# Altium PCB Beetech Metro Shield 1.0.PcbDoc
Units mm, origin at the board's own origin, x right, y up, seen from the top; angles counter-clockwise.
Board outline 68 x 53.53 mm, 2 copper layers (Top Layer, Bottom Layer), stack 1.671 mm thick; 23 components, 21 nets, 102 pads, 73 vias.
Unrouted connection lines stored in the file: 80.
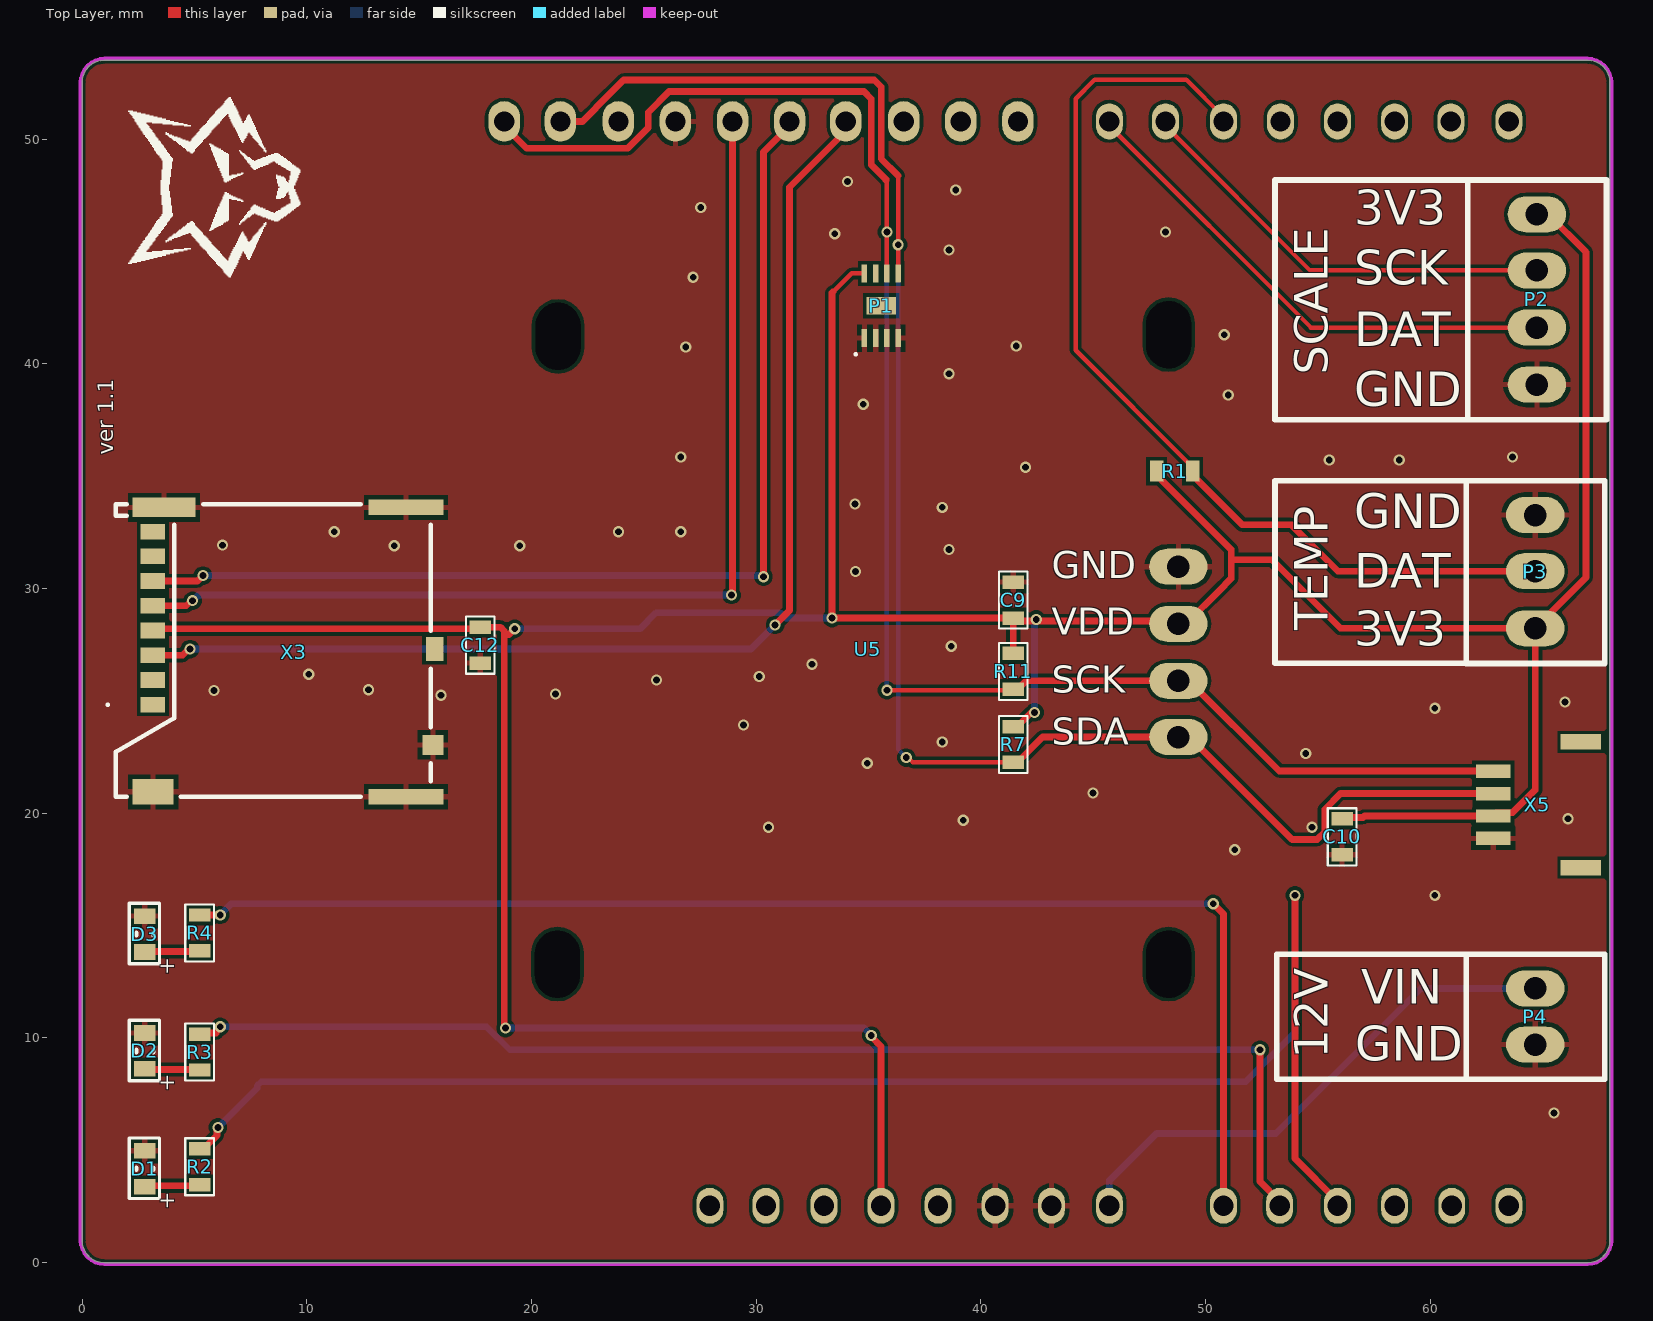
[diagram p0: Top Layer view]
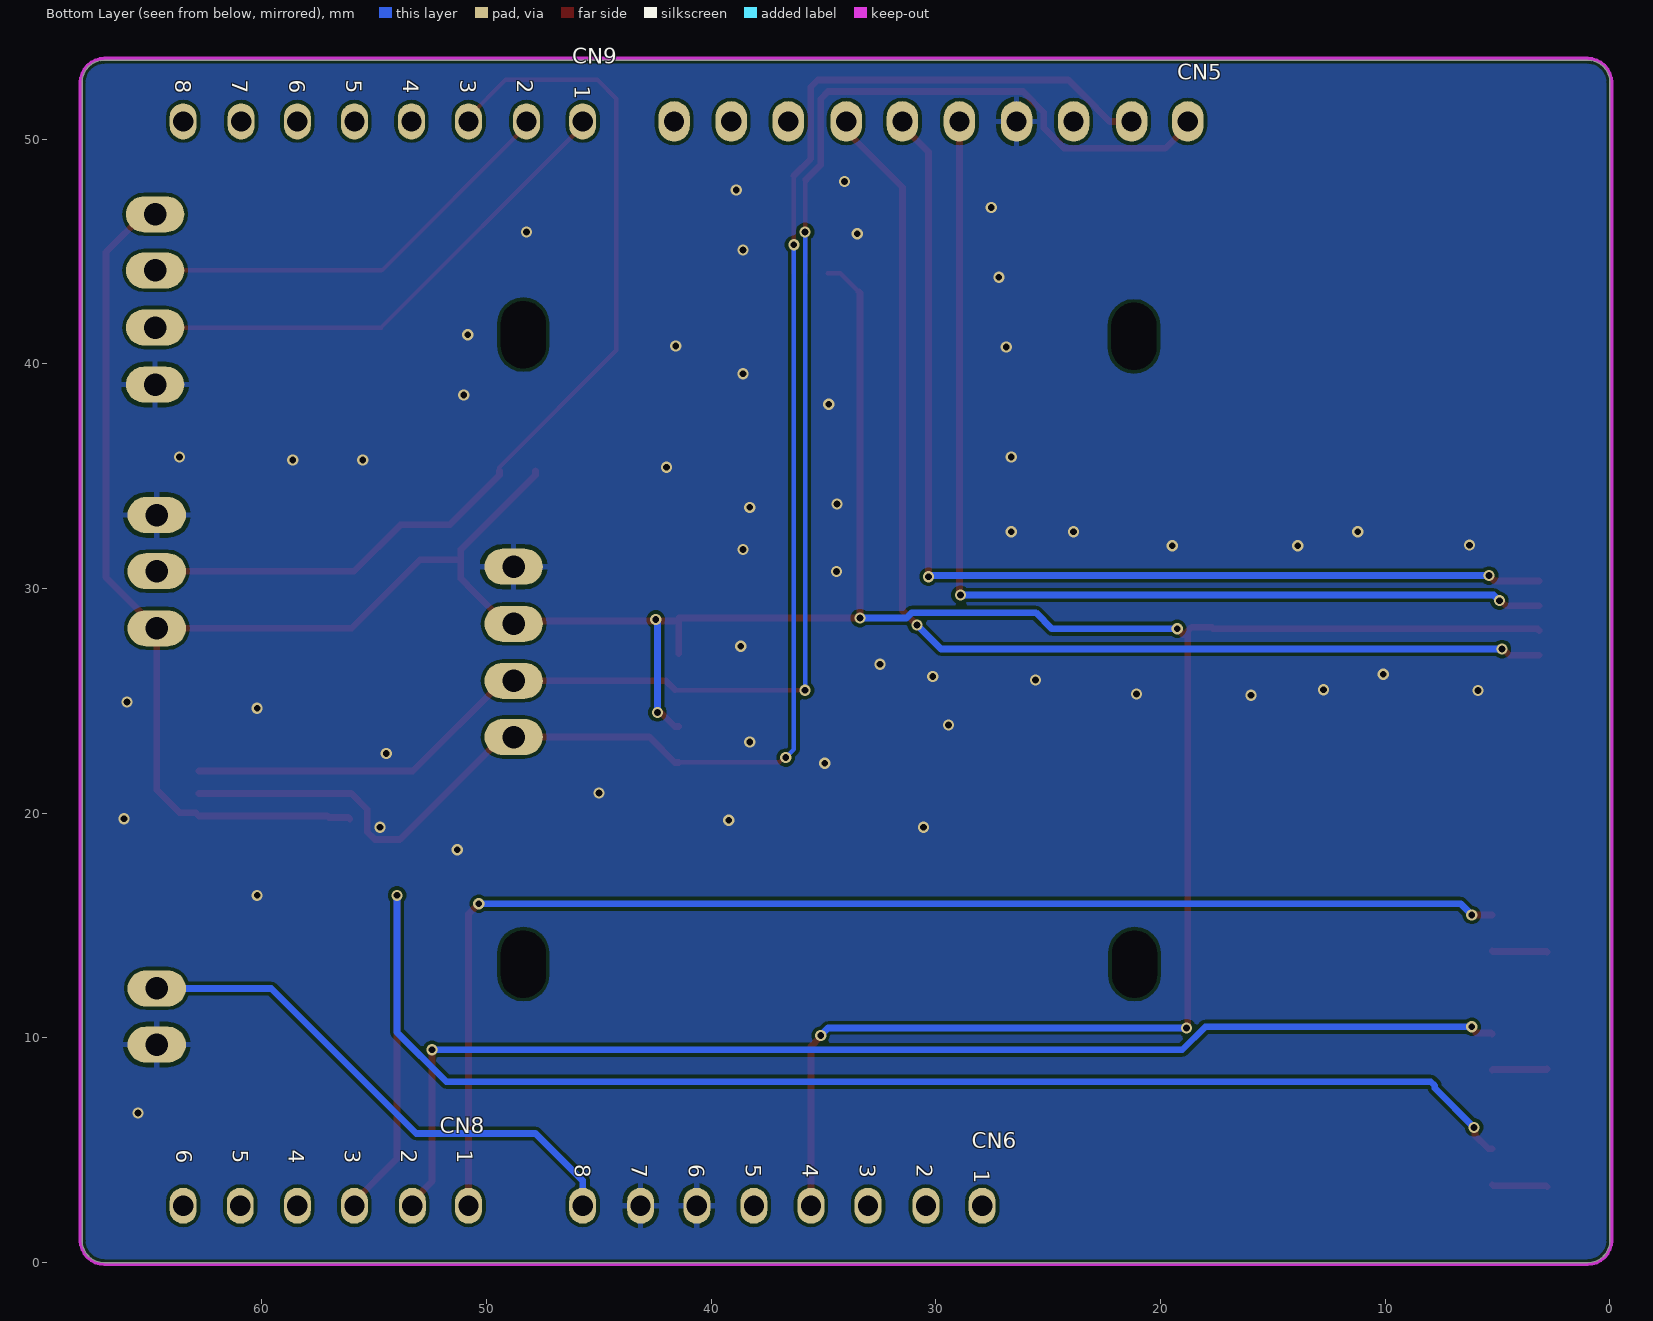
[diagram p1: Bottom Layer view, seen from below]
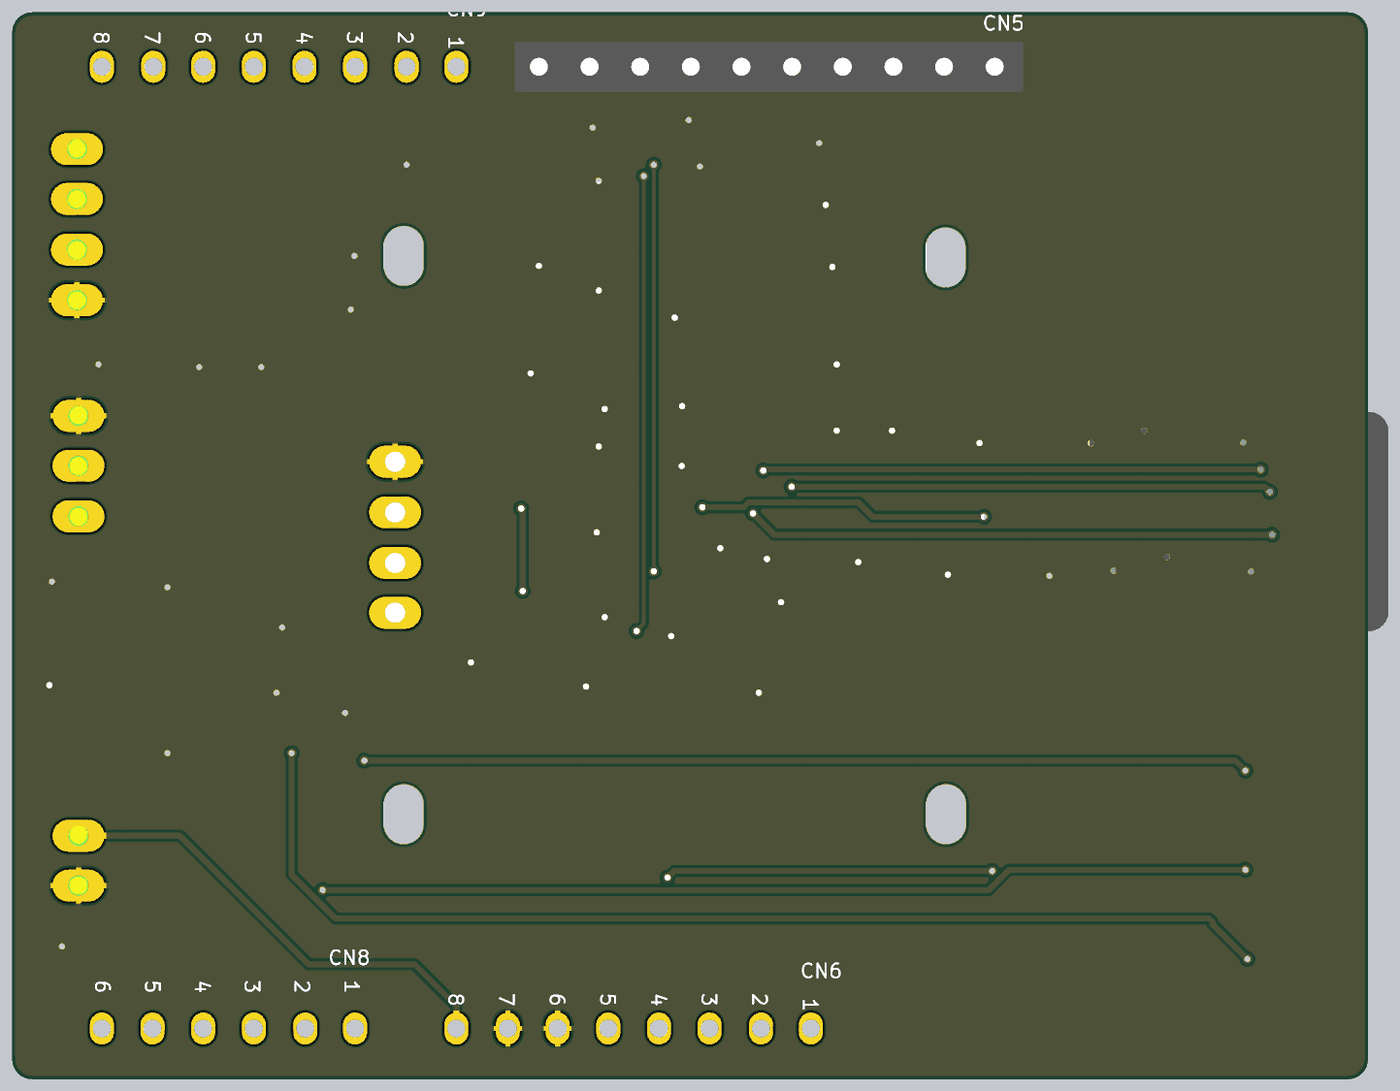
[diagram p2: 3D render of the assembled board from below, using the file's embedded part models]

## Layer stack, top to bottom
Top Solder: solder mask 0.0102, Solder Resist, Dk 3.5
Top Layer: signal copper 0.0356
Dielectric1: core 1.6, FR-4, Dk 4.8
Bottom Layer: signal copper 0.0356
Bottom Solder: solder mask 0.0102, Solder Resist, Dk 3.5

## Board outline
67,53.522 1,53.522 0.805,53.503 0.617,53.446 0.444,53.354 0.293,53.229 0.169,53.078 0.076,52.905 0.019,52.717 0,52.522 0,0.992 0.019,0.797 0.076,0.61 0.169,0.437 0.293,0.285 0.444,0.161 0.617,0.068 0.805,0.012 1,-0.008 67,-0.008 67.195,0.012 67.383,0.068 67.556,0.161 67.707,0.285 67.831,0.437 67.924,0.61 67.981,0.797 68,0.992 68,52.522 67.981,52.717 67.924,52.905 67.831,53.078 67.707,53.229 67.556,53.354 67.383,53.446 67.195,53.503

## Design rules (kind name [scope] priority, off if disabled: settings)
Clearance [All] p1: gap=0.15 ignorepadtopadclearanceinfootprint=FALSE
ComponentClearance [All] p1: gap=0.001 collisioncheckmode=3 verticalgap=0.254 showdistances=FALSE
FabricationTestPointUsage [All] p1 off: valid=0 allowmultiple=FALSE
FabricationTestpoint [All] p1 off: side=3 testpointundercomponent=TRUE minsize=1.016 maxsize=2.54 preferedsize=1.524 minholesize=0 maxholesize=1.016 preferedholesize=0.813 testpointgrid=0.025 allowsidetop=TRUE allowsidebottom=TRUE usegrid=TRUE gridtolerance=0
HoleSize [All] p1: absolutevalues=TRUE maxlimit=3.81 minlimit=0.025 maxpercent=80.000 minpercent=20.000
HoleToHoleClearance [All] p1: gap=0 allowstackedmicrovias=TRUE
MinimumSolderMaskSliver [All] p1: minsoldermaskwidth=0
PolygonConnect [InNet('VCC 3.3V')] p1: connectstyle=Direct reliefconductorwidth=0.254 reliefentries=4 polygonreliefangle="90 Angle" airgapwidth=0.254
PolygonConnect PolygonConnect_1 [InNet('GND')] p2: thpad.connectstyle=Relief thpad.reliefconductorwidth=0.254 thpad.reliefentries=4 thpad.polygonreliefangle="90 Angle" thpad.airgapwidth=0.2 smdpad.connectstyle=Relief smdpad.reliefconductorwidth=0.254 smdpad.reliefentries=4 smdpad.polygonreliefangle="90 Angle" smdpad.airgapwidth=0.2 via.connectstyle=Direct via.reliefconductorwidth=0.254 via.reliefentries=4 via.polygonreliefangle="90 Angle" via.airgapwidth=0.2
RoutingVias [All] p1: holewidth=0.3 width=0.5 viastyle="Through Hole" minholewidth=0.2 minwidth=0.4 maxholewidth=1.2 maxwidth=2 useviatemplates=TRUE viatemplateguid#1={3DB4D02C-F2AA-4D96-93EA-058B72C6274F} viatemplateguid#2={7253A52D-AA54-4A84-B513-F050F2263B0A} viatemplatename#1=v50h30m0mx0 viatemplatename#2=v50h30m50mx0
SilkToSilkClearance [All] p1: silktosilkclearance=0.152
SilkToSolderMaskClearance [IsPad] p1: minsilkscreentomaskgap=0 clearancetoexposedcopper=TRUE
SolderMaskExpansion [All] p1: expansion=0.102 istentingtop=FALSE
SupplyNets "Schematic Supply Nets_7" [InNet('VIN')] p1: voltage=0.000
SupplyNets "Schematic Supply Nets_6" [InNet('5V')] p2: voltage=0.000
SupplyNets "Schematic Supply Nets_5" [InNet('3V3')] p3: voltage=0.000
SupplyNets "Schematic Supply Nets" [InNet('GND')] p4: voltage=0.000
Width [All] p1: maxlimit=5.08 minlimit=0.01 preferedwidth=0.305 minimp=50.000000 maximp=50.000000 favimp=50.000000
22 further rules are at their usual default settings.

## Components (designator, comment, footprint, x,y, rotation, side; value= is the part's Value field where it differs from the comment)
C9 "10uF 0603" "CAP 0603 - OUTLINE" 41.447,29.489 r270 top value=10uF
C10 "10uF 0603" "CAP 0603 - OUTLINE" 56.081,18.95 r90 top value=10uF
C12 "10uF 0603" "CAP 0603 - OUTLINE" 17.724,27.483 r90 top value=10uF
CN5 "10-Pin Stiftleiste 10x1 2.54 Low Profile" "10PIN - III" 18.79,50.792 r270 bottom locked
CN6 "8-Pin Stiftleiste 8x1 2.54 Low Profile" "8 PIN - Stiftleiste" 27.94,2.532 r270 bottom locked
CN8 "6-PiN" 6PIN 50.8,2.532 r270 bottom locked
CN9 "8-Pin Stiftleiste 8x1 2.54 Low Profile" "8 PIN - Stiftleiste" 45.72,50.792 r270 bottom locked
D1 "LED Diode SMD LOW CURRENT" "LED SMD 0603 FOOTPRINT" 2.788,4.176 r90 top
D2 "LED Diode SMD LOW CURRENT" "LED SMD 0603 FOOTPRINT" 2.788,9.423 r90 top
D3 "LED Diode SMD LOW CURRENT" "LED SMD 0603 FOOTPRINT" 2.788,14.623 r90 top
P1 "EEPROM CAT24C512HU5IGT3" "UDFN8 3.0x2.0 CAT24C512HU5IGT3" 35.57,42.588 r90 top
P2 "4-Pin Right Angle Housing" "4PIN - RND 205-EK254-2.54-04P" 64.75,46.659 r0 top
P3 "3-Pin Right Angle Housing" "3PIN - RND 205-EK254-2.54-03P" 64.674,33.273 r0 top
P4 "2-Pin Right Angle Housing" "2PIN - RND 205-EK254-2.54-02P" 64.674,12.204 r0 top
R1 "4.7k Ohm 0603" "RES 0603 FOOTPRINT" 48.622,35.23 r180 top value=4.7k
R2 "330 Ohm 0603" "RES 0603 FOOTPRINT - OUTLINE" 5.232,4.267 r90 top value=330
R3 "750 Ohm 0603" "RES 0603 FOOTPRINT - OUTLINE" 5.232,9.373 r90 top value=750
R4 "330 Ohm 0603" "RES 0603 FOOTPRINT - OUTLINE" 5.232,14.673 r90 top value=330
R7 "10k Ohm 0603" "RES 0603 FOOTPRINT - OUTLINE" 41.447,23.061 r90 top value=10k
R11 "10k Ohm 0603" "RES 0603 FOOTPRINT - OUTLINE" 41.447,26.312 r90 top value=10k
U5 "OLED I2C 1.3 128x64" "OLED 1.3 128x64 I2C" 48.793,23.393 r180 top locked
X3 "SD micro Card Holder_4" "SD Card Holder - micro - 4" 8.788,27.214 r90 top
X5 "4-Pin" "QWIIC JST CONNECTOR - SMD 4-PIN" 62.806,20.378 r90 top

## Footprints (in the part's own frame and the unit in brackets; to place one, negate y for a bottom-side part, rotate by r counter-clockwise, add the part's x,y. Pads: shape width x height; smd on the part's side, far side on the other; paste and mask are expansions set on the pad)
"2PIN - RND 205-EK254-2.54-02P" [mm] "RND 205-EK254-2.54-02P"
  oval 2.6x1.6 hole 1: 1(0,0) 2(0,-2.5)
  silkscreen extent -3.07,-4.04 3.1,1.52, body extent -3.1,-3.99 3.1,1.55, height 8.51
"3PIN - RND 205-EK254-2.54-03P" [mm] "RND 205-EK254-2.54-03P"
  oval 2.6x1.6 hole 1: 1(0,0) 2(0,-2.5) 3(0,-5.04)
  silkscreen extent -3.07,-6.6 3.1,1.52, body extent -3.1,-6.55 3.1,1.53, height 8.51
"4PIN - RND 205-EK254-2.54-04P" [mm] "RND 205-EK254-2.54-04P"
  oval 2.6x1.6 hole 1: 1(0,0) 2(0,-2.5) 3(0,-5.04) 4(0,-7.58)
  silkscreen extent -3.07,-9.14 3.1,1.52, body extent -3.1,-9.1 3.1,1.52, height 8.51
6PIN [mm]
  oval 1.6x1.2 hole 0.9: 1(0,0) 2(0,-2.5) 3(0,-5.08) 4(0,-7.62) 5(0,-10.16) 6(0,-12.7)
"8 PIN - Stiftleiste" [mm] "2212S-08SG-85 -  Board-to-Board-Steckve61300811021 -  Board-to-Board-Steckverbinder, abgewinkelt, 2.54 mm, 8 Kontakt(e), Stiftleiste, Baureihe WR-PHD rbinder, 2.54 mm, 8 Kontakt(e), Buchse, Baureihe 2212S, Durchsteckmontage"
  oval 1.6x1.2 hole 0.9: 1(0,0) 2(0,-2.5) 3(0,-5.08) 4(0,-7.62) 5(0,-10.16) 6(0,-12.7) 7(0,-15.2) 8(0,-17.78)
  body extent -1.25,-18.99 1.25,1.51, height 8
"10PIN - III" [mm]
  oval 1.8x1.4 hole 0.9: 1(0,0) 2(0,-2.5) 3(0,-5.08) 4(0,-7.62) 5(0,-10.16) 6(0,-12.7) 7(0,-15.2) 8(0,-17.78) 9(0,-20.32) 10(0,-22.86)
  body extent -1.25,-24 1.25,1.5, height 8
"CAP 0603 - OUTLINE" [mm] "CAP 0603"
  rect 0.6x0.95 smd: 1(-0.8,0) 2(0.8,0)
  silkscreen extent -1.27,-0.64 1.27,0.64, body extent -0.8,-0.4 0.8,0.4, height 0.8
"LED SMD 0603 FOOTPRINT" [mm] "Chip Diode, 2-Leads, Body 1.60x0.80mm, IPC Medium Density"
  rect 0.7x0.95 smd: 1(-0.8,0) 2(0.8,0)
  silkscreen extent -1.32,-0.66 1.37,0.69, body extent -0.8,-0.4 0.8,0.4, height 0.35
"OLED 1.3 128x64 I2C" [mm] "OLED 1.3 128x64 I2C"
  oval 2.6x1.6 hole 1: 1(0,-7.58) 2(0,-5.04) 3(0,-2.5) 4(0,0)
  rrect50% 1x1 hole 2 slot 3 at 90 deg: 5(0.432,10.109) 6(27.635,10.109) 7(27.61,-17.831) 8(0.432,-17.907)
  body extent -1.45,-21.64 29.55,13.86, height 8.6
"QWIIC JST CONNECTOR - SMD 4-PIN" [mm] "QWIIC JST CONNECTOR - SMD 4-PIN"
  rect 0.7x1.8 smd: 0(-2.8,-3.9) 0(2.8,-3.9)
  rect 0.6x1.55 smd: 1(1.5,0) 2(0.5,0) 3(-0.5,0) 4(-1.5,0)
  body extent -3.03,-4.73 2.97,0.22, height 2.96
"RES 0603 FOOTPRINT" [mm] "RES 0603 FOOTPRINT"
  rect 0.6x0.95 smd: 1(-0.8,0) 2(0.8,0)
  body extent -0.8,-0.4 0.8,0.4, height 0.8
"RES 0603 FOOTPRINT - OUTLINE" [mm] "RES 0603 FOOTPRINT"
  rect 0.6x0.95 smd: 1(-0.8,0) 2(0.8,0)
  silkscreen extent -1.27,-0.64 1.27,0.64, body extent -0.8,-0.4 0.8,0.4, height 0.8
"SD Card Holder - micro - 4" [mm] "micro SD Card holder, Molex Part Number:    / MEM2075-00-140-01-A"
  rect 0.7x1.1 smd: 1(-2.38,5.64) 2(-1.28,5.64) 3(-0.18,5.64) 4(0.92,5.64) 5(2.02,5.64) 6(3.12,5.64) 7(4.22,5.64) 8(5.32,5.64)
  rect 0.9x0.93 smd: 9(-4.17,-6.825)
  rect 1.05x0.78 smd: 10(0.095,-6.9)
  rect 0.7x3.33 smd: 20(-6.48,-5.625) 20(6.4,-5.625)
  rect 1.14x1.83 smd: 20(-6.26,5.625)
  rect 0.86x2.8 smd: 20(6.4,5.14)
  silkscreen extent -6.48,-6.74 6.55,7.7, body extent -6.6,-7.02 6.5,9.82, height 1.29
"UDFN8 3.0x2.0 CAT24C512HU5IGT3" [mm] "CAT24C512HU5IGT3"
  rect 0.8x0.25 smd: 1(-1.44,0.75) 2(-1.44,0.25) 3(-1.44,-0.25) 4(-1.44,-0.75) 5(1.44,-0.75) 6(1.44,-0.25) 7(1.44,0.25) 8(1.44,0.75)
  rect 0.8x1.3 smd: 9(0,0)
  silkscreen extent -2.21,1.09 -2.11,1.19, body extent -1.5,-1 1.5,1, height 0.55

## Part data
C9 C10 C12: "C CERAMIC SMD", Bezeichnung="C SMD", Dielektrikum=X5R, Haendler=Mouser, Haendler Nr=810-C1608X5R1A106K, Hersteller=TDK, Hersteller Nr=C1608X5R1A106K080AC, housing/footprint=0603, Preis (CHF)=0.5, Umax=10V
CN5: "Low Profile 10-Pin Stiftleiste 10x1 2.54 Low Profile", Haendler=Mouser, Haendler Nr=200-TLW11006GS, Hersteller=Samtec, Hersteller Nr=TLW-110-06-G-S, Preis (CHF)=2.2
CN6 CN9: "Low Profile 8-Pin Stiftleiste 8x1 2.54", Haendler=Mouser, Haendler2=Farnell, Haendler2 Nr=2856894, Haendler Nr=200-TLW10806TS, link=https://www.mouser.ch/Connectors/Headers-Wire-Housings/_/N-ay0lo?P=1ytkls2&Keyword=tlw-108&FS=True, Preis (CHF)=1.06
CN8: "6-Pin", LatestRevisionDate=17-Jul-2002, LatestRevisionNote="Re-released for DXP Platform.", Publisher="Altium Limited"
D1: library part "LED Diode SMD - GREEN - 0603 - 2mA_1", "LED Green APT1608LZGCK", COLOR=GREEN, Forward Voltage=2.65, Haendler=Mouser, Haendler Nr=604-APT1608LZGCK, Hersteller=Knightbright, Hersteller Nr=APT1608LZGCK, If=2mA, link=http://ch.farnell.com/kingbright/kpt-1608lvzgck/led-gr-n-50mcd-525nm-smd/dp/2610409, Preis (CHF)=0.321
D2: library part "LED Diode SMD - RED - 0603 - 2mA_1", "LED Red APT1608LSECKJ3RV", COLOR=RED, Forward Voltage=1.8V, Haendler=Mouser, Haendler Nr=604-APT1608LSECKJ3RV, Hersteller=Knightbright, Hersteller Nr=APT1608LSECKJ3RV, If=2mA, Preis (CHF)=0.6
D3: library part "LED Diode SMD - BLUE - 0603 - 2mA_2", "LED Blue - APT1608LVBC/D", COLOR=BLUE, Forward Voltage=2.65v, Haendler=Mouser, Haendler Nr=604-APT1608LVBCD, Hersteller=Knightbright, Hersteller Nr=APT1608LVBC/D, If=2mA, link=https://www.mouser.ch/ProductDetail/Kingbright/APT1608LVBC-D?qs=sGAEpiMZZMuCm2JlHBGefkORPgrtEizykCFNBGYC3wJYND9tUwO9bA%3d%3d, Preis (CHF)=0.38
P2: library part "4-Pin Screw Terminal", "4-Pin", ComponentLink1Description=Mouser, ComponentLink1URL=https://www.mouser.ch/ProductDetail/TE-Connectivity/640453-2?qs=sGAEpiMZZMs%252bGHln7q6pm5E1Eb6qwPl2KIU5TYv3tVY%3d, Haendler=Distrelec, Haendler Nr=301-27-920, Hersteller=RND, Hersteller Nr="RND 205-EK254-2.54-04P", Preis (CHF)=0.60
P3: library part "3-Pin Screw Terminal", "3-Pin", ComponentLink1Description=Mouser, ComponentLink1URL=https://www.mouser.ch/ProductDetail/TE-Connectivity/640453-2?qs=sGAEpiMZZMs%252bGHln7q6pm5E1Eb6qwPl2KIU5TYv3tVY%3d, Haendler=Distrelec, Haendler Nr=301-27-919, Preis (CHF)=0.60
P4: library part "2-Pin Screw Terminal", "2-Pin", ComponentLink1Description=Mouser, ComponentLink1URL=https://www.mouser.ch/ProductDetail/TE-Connectivity/640453-2?qs=sGAEpiMZZMs%252bGHln7q6pm5E1Eb6qwPl2KIU5TYv3tVY%3d, Haendler=Distrelec, Haendler Nr=301-27-918, Hersteller="RND 205-EK254-2.54-02P", Preis (CHF)=0.60
R1 R2 R3 R4 R7 R11: "R SMD", Bezeichnung="R SMD", Haendler=Mouser, housing/footprint=0603
  R1: Haendler Nr=755-ESR03EZPF4701, Preis (CHF)=0.01
  R2 R4: Haendler Nr=603-RC0603FR-07330RL, Hersteller=YAGEO, Hersteller Nr=RC0603FR-07330RL, Preis (CHF)=0.01
  R3: Haendler2=Farnell, Haendler2 Nr=2059597, Haendler Nr=71-CRCW0603750RFKEAH, Hersteller=Panasonic, Preis (CHF)=0.0123
  R7 R11: Haendler Nr=603-AC0603FR-0710KL, Hersteller=Yageo, Hersteller Nr=AC0603FR-0710KL, Preis (CHF)=0.01
U5: "SSD1306 I2C", Chip="SSD1306 I2C", Haendler=Aliexpress, Haendler Nr="OLED I2C 128x64", link=https://de.aliexpress.com/item/1005008365029314.html?gatewayAdapt=glo2deu#nav-specification, Preis (CHF)=2
X3: "SD micro Card  Holder", Haendler=Mouser, Haendler2=Digikey, Haendler2 Nr=2073-MEM2075-00-140-01-ATR-ND, Haendler Nr=640-MEM20750014001A, Hersteller=GCT, Hersteller Nr=MEM2075-00-140-01-A, Preis (CHF)=1.6
X5: library part "4-Pin QWIIC JST CONNECTOR - SMD 4_1", "QWIIC JST CONNECTOR - SMD 4-PIN", Haendler=Mouser, Haendler2=Digikey, Haendler2 Nr=455-SM04B-SRSS-TBCT-ND, Haendler2 Nr 2=455-SM04B-SRSS-TBCT-ND, Haendler Nr=306-SM04BSRSSTBLFSN, Hersteller=Molex, Hersteller Nr=SM04B-SRSS-TB, link=https://cdn-learn.adafruit.com/downloads/pdf/introducing-adafruit-stemma-qt.pdf?timestamp=1629187570, Preis (CHF)=0.5
P1: Datasheet=https://www.mouser.ch/ProductDetail/onsemi/CAT24C512HU5IGT3?qs=5C9Q4QJFsuOiuCBGwG%2FnpA%3D%3D, Haendler=Mouser, Haendler Nr=863-CAT24C512HU5IGT3, Hersteller="ON SEMICONDUCTOR", Hersteller Nr=CAT24C512HU5IGT3, Preis (CHF)=0.8

## Via types
v1: diameter 0.5/0.5 (per signal layer), hole 0.3, Top Layer to Bottom Layer, tented both sides, 51 vias
v2: diameter 0.5, hole 0.3, Top Layer to Bottom Layer, tented both sides, 22 vias

## Nets (pads, with @x,y where several pads share a name; then routed paths per layer and width w, separated by ;. In a path a pad name is that pad's centre, name@x,y a point inside that pad or via, vN(x,y) a via of type N, cw(c..) or ccw(c..) an arc to the next point about the centre after c; other vN are vias at no path point)
3V3: C9.2 C10.2 C12.2 CN6.4 P1.8 P2.1 P3.3 R1.2 R7.2 R11.2 U5.2 X3.4 X5.3 | length 172.2
  Top Layer w0.2: 33.426,43.205 34.249,44.028 P1.8
  Top Layer w0.3: X3.4 3.223,28.209 17.65,28.209 C12.2 18.614,28.283 18.79,28.107 18.79,27.953 ; v2(18.847,10.439) 18.79,10.496 18.79,27.953 ; v2(19.258,28.209) 19.002,27.953 18.79,27.953 ; 33.426,43.205 33.382,43.161 v2(33.382,28.689) C9.2 ; v2(35.128,10.109) 35.128,10.055 35.56,9.623 CN6.4 ; R7.2 41.622,23.861 42.247,24.486 v2(42.393,24.486) ; R11.2 41.447,28.539 41.469,28.561 42.469,28.561 48.665,28.561 U5.2 49.125,28.433 49.209,28.518 50.593,29.901 51.142,30.45 51.142,31.284 ; R1.2 47.822,35.055 51.142,31.735 51.142,31.284 ; C10.2 56.139,19.807 57.006,19.807 57.077,19.878 X5.3 62.956,20.028 63.668,20.028 64.674,21.034 P3.3 56.01,28.233 52.959,31.284 51.142,31.284 ; P2.1 65.25,46.659 66.934,44.974 66.934,30.493 65.422,28.982 65.422,28.833 P3.3@64.822,28.233
  Bottom Layer w0.3: v2(18.847,10.439) 34.798,10.439 v2(35.128,10.109) ; v2(19.258,28.209) 24.831,28.209 25.551,28.929 31.07,28.929 31.309,28.689 v2(33.382,28.689) ; v2(42.393,24.486) 42.393,28.55 v2(42.469,28.626)
5V: CN6.5
"CARD DETECT": X3.10
DAT_SCALE: CN9.1 P2.3 | length 22.9
  Top Layer w0.2: CN9.1 45.72,50.592 54.694,41.619 P2.3
DAT_TEMP: CN9.3 P3.2 R1.1 | length 43.7
  Top Layer w0.2: R1.1 49.422,35.405 44.221,40.605 44.221,51.801 45.061,52.64 49.152,52.64 50.8,50.992 CN9.3
  Top Layer w0.3: R1.1 49.422,35.055 51.638,32.839 53.823,32.839 55.889,30.773 P3.2
GND: C9.1 C10.1 C12.1 CN5.4 CN6.6 CN6.7 D1.2 D2.2 D3.2 P1.1 P1.2 P1.3 P1.4 P2.4 P3.1 P4.2 U5.1 X3.9 X3.20 X5.4
  other v1: 65.507,6.655 60.209,16.346 51.3,18.375 30.554,19.378 54.742,19.378 39.218,19.691 66.132,19.761 44.989,20.904 34.947,22.221 54.46,22.658 38.282,23.171 29.437,23.925 60.209,24.67 66.003,24.956 15.977,25.248 21.068,25.307 5.867,25.461 12.751,25.502 25.564,25.934 30.143,26.091 10.084,26.183 32.485,26.634 38.681,27.43 34.419,30.759 38.583,31.735 13.894,31.902 19.485,31.907 6.255,31.934 11.227,32.534 23.87,32.534 26.645,32.534 38.282,33.614 34.397,33.764 41.993,35.405 55.507,35.724 58.621,35.724 26.645,35.855 63.668,35.856 34.77,38.202 51.016,38.613 38.583,39.564 26.864,40.747 41.582,40.8 50.836,41.3 27.196,43.856 38.583,45.073 33.5,45.788 48.22,45.872 27.534,46.964 38.888,47.735 34.069,48.115
"LED 1 B": CN8.1 R4.2 | length 59
  Top Layer w0.3: R4.2 v2(6.147,15.473) ; v2(50.343,15.977) 50.8,15.519 CN8.1
  Bottom Layer w0.3: v2(6.147,15.473) 6.651,15.977 v2(50.343,15.977)
"LED 1 G": CN8.3 R2.2 | length 71.8
  Top Layer w0.3: R2.2 5.407,5.067 6.007,5.667 6.007,5.982 v2(6.045,6.02) ; v2(53.98,16.346) 53.98,4.632 55.88,2.732 CN8.3
  Bottom Layer w0.3: v2(6.045,6.02) 7.798,7.772 7.798,7.876 7.974,8.052 51.781,8.052 53.98,10.251 v2(53.98,16.346)
"LED 1 R": CN8.2 R3.2 | length 55.1
  Top Layer w0.3: R3.2 5.282,10.223 5.971,10.223 5.971,10.266 6.147,10.442 v2(6.147,10.496) ; v2(52.426,9.474) 52.426,3.607 53.3,2.732 CN8.2
  Bottom Layer w0.3: v2(6.147,10.496) 18.012,10.496 19.034,9.474 v2(52.426,9.474)
NetD1_1: D1.1 R2.1 | length 2.5
  Top Layer w0.3: D1.1 2.834,3.422 5.187,3.422 R2.1
NetD2_1: D2.1 R3.1 | length 2.5
  Top Layer w0.3: D2.1 2.813,8.598 5.207,8.598 R3.1
NetD3_1: D3.1 R4.1 | length 2.5
  Top Layer w0.3: D3.1 2.813,13.848 5.207,13.848 R4.1
"SCK SCALE": CN9.2 P2.2 | length 19.4
  Top Layer w0.2: CN9.2 48.22,50.592 54.654,44.159 P2.2
SCL: CN5.1 P1.6 R11.1 U5.3 X5.1 | length 75.8
  Top Layer w0.2: 35.783,48.178 35.82,48.141 v2(35.82,45.872) 35.82,45.649 P1.6 ; v2(35.82,25.472) 41.582,25.472 R11.1@41.622,25.512
  Top Layer w0.3: CN5.1 18.79,50.592 19.79,49.592 24.284,49.592 25.204,50.512 25.204,51.201 26.124,52.121 34.8,52.121 35.12,51.801 35.12,48.878 35.783,48.215 35.783,48.178 ; R11.1@41.622,25.512 42.003,25.893 49.266,25.893 53.282,21.878 X5.1
  Bottom Layer w0.2: v2(35.82,25.472) v2(35.82,45.872)
SD_CS: X3.2
SDA: CN5.2 P1.5 R7.1 U5.4 X5.2 | length 76.8
  Top Layer w0.2: P1.5 v2(36.32,45.3) 36.32,48.378 ; v2(36.68,22.479) 36.761,22.479 36.979,22.261 R7.1
  Top Layer w0.3: CN5.2 22.276,50.792 22.866,51.382 22.866,51.402 24.104,52.64 35.257,52.64 35.57,52.327 35.57,49.128 36.32,48.378 ; R7.1 41.622,22.261 42.754,23.393 49.293,23.393 53.859,18.828 54.97,18.828 55.306,19.164 55.306,20.174 56.011,20.878 X5.2
  Bottom Layer w0.2: v2(36.32,45.3) 36.32,22.839 v2(36.68,22.479)
"SPI CS": CN5.8
"SPI MISO": CN5.6 X3.6 | length 48
  Top Layer w0.3: X3.6 5.133,30.334 v2(5.38,30.582) ; v2(30.328,30.531) 30.328,49.43 31.49,50.592 CN5.6
  Bottom Layer w0.3: v2(5.38,30.582) 30.277,30.582 v2(30.328,30.531)
"SPI MOSI": CN5.7 X3.3 | length 52
  Top Layer w0.3: X3.3 4.476,27.034 4.751,27.309 v2(4.805,27.309) ; v2(30.842,28.379) 31.49,29.027 31.49,47.861 33.99,50.361 CN5.7
  Bottom Layer w0.3: v2(4.805,27.309) 29.772,27.309 v2(30.842,28.379)
"SPI SCK": CN5.5 X3.5 | length 47.1
  Top Layer w0.3: X3.5 4.636,29.234 4.866,29.464 v2(4.92,29.464) ; v2(28.905,29.718) 28.95,29.763 CN5.5
  Bottom Layer w0.3: v2(4.92,29.464) 5.174,29.718 v2(28.905,29.718)
VIN: CN6.8 P4.1 | length 23.6
  Bottom Layer w0.3: CN6.8 45.72,3.657 47.814,5.752 53.128,5.752 59.58,12.204 P4.1
pads on no net: CN5.3 CN5.9 CN5.10 CN6.1 CN6.2 CN6.3 CN8.4 CN8.5 CN8.6 CN9.4 CN9.5 CN9.6 CN9.7 CN9.8 P1.7 P1.9 U5.5 U5.6 U5.7 U5.8 X3.1 X3.7 X3.8 X5.0

## Polygon pours and split planes (outlines as drawn)
GND on Top Layer "GND_L01_P000" (solid, pour order 0): 67,53.522 1,53.522 0.805,53.503 0.617,53.446 0.444,53.354 0.293,53.229 0.169,53.078 0.076,52.905 0.019,52.717 0,52.522 0,0.992 0.019,0.797 0.076,0.61 0.169,0.437 0.293,0.285 0.444,0.161 0.617,0.068 0.805,0.012 1,-0.008 67,-0.008 67.195,0.012 67.383,0.068 67.556,0.161 67.707,0.285 67.831,0.437 67.924,0.61 67.981,0.797 68,0.992 68,52.522 67.981,52.717 67.924,52.905 67.831,53.078 67.707,53.229 67.556,53.354 67.383,53.446 67.195,53.503
GND on Bottom Layer "GND_L02_P001" (solid, pour order 1): 67,53.522 1,53.522 0.805,53.503 0.617,53.446 0.444,53.354 0.293,53.229 0.169,53.078 0.076,52.905 0.019,52.717 0,52.522 0,0.992 0.019,0.797 0.076,0.61 0.169,0.437 0.293,0.285 0.444,0.161 0.617,0.068 0.805,0.012 1,-0.008 67,-0.008 67.195,0.012 67.383,0.068 67.556,0.161 67.707,0.285 67.831,0.437 67.924,0.61 67.981,0.797 68,0.992 68,52.522 67.981,52.717 67.924,52.905 67.831,53.078 67.707,53.229 67.556,53.354 67.383,53.446 67.195,53.503

## Keep-outs
Keep-Out Layer:
  lines w0.15: -0.075,0.985 cw(c0,0.992) -0.075,0.992 ; -0.075,0.985 cw(c0,0.992) -0.075,0.992 ; -0.075,0.985 -0.055,0.79 ; -0.075,0.992 -0.075,52.522 ; -0.075,52.522 cw(c0,52.522) -0.075,52.53 ; -0.075,52.522 cw(c0,52.522) -0.075,52.53 ; -0.075,52.53 -0.055,52.725 ; -0.055,0.79 ccw(c0.019,0.797) -0.053,0.776 ; -0.055,0.79 ccw(c0.019,0.797) -0.053,0.775 ; -0.055,52.725 cw(c0.019,52.717) -0.053,52.739 ; -0.055,52.725 cw(c0.019,52.717) -0.053,52.739 ; -0.053,0.775 cw(c0.019,0.797) -0.053,0.776 ; -0.053,0.775 -0.053,0.775 ; -0.053,0.775 0.004,0.588 ; -0.053,0.776 -0.053,0.775 ; -0.053,52.739 ccw(c0.019,52.717) -0.053,52.739 ; -0.053,52.739 0.004,52.927 ; -0.053,52.739 -0.053,52.739 ; -0.053,52.739 -0.053,52.739 ; 0.004,0.588 ccw(c0.076,0.61) 0.004,0.588 ; 0.004,0.588 ccw(c0.076,0.61) 0.01,0.574 ; 0.004,0.588 0.004,0.588 ; 0.004,0.588 0.004,0.588 ; 0.004,52.927 cw(c0.076,52.905) 0.004,52.927 ; 0.004,52.927 0.004,52.927 ; 0.004,52.927 cw(c0.076,52.905) 0.01,52.94 ; 0.004,52.927 0.004,52.927 ; 0.004,0.588 ccw(c0.076,0.61) 0.01,0.574 ; 0.004,52.927 cw(c0.076,52.905) 0.01,52.94 ; 0.01,0.574 ccw(c0.076,0.61) 0.01,0.574 ; 0.01,0.574 0.01,0.574 ; 0.01,0.574 0.01,0.574 ; 0.01,0.574 0.102,0.402 ; 0.01,52.941 ccw(c0.076,52.905) 0.01,52.94 ; 0.01,52.941 0.102,53.113 ; 0.01,52.94 0.01,52.941 ; 0.01,52.94 0.01,52.94 ; 0.102,0.401 ccw(c0.169,0.437) 0.111,0.389 ; 0.102,0.402 ccw(c0.169,0.437) 0.102,0.401 ; 0.102,0.401 ccw(c0.169,0.437) 0.111,0.389 ; 0.102,0.402 0.102,0.401 ; 0.102,0.401 0.102,0.401 ; 0.102,53.113 cw(c0.169,53.078) 0.111,53.125 ; 0.102,53.113 cw(c0.169,53.078) 0.102,53.113 ; 0.102,53.113 0.102,53.113 ; 0.102,53.113 0.102,53.113 ; 0.102,53.113 cw(c0.169,53.078) 0.111,53.125 ; 0.111,0.389 0.235,0.238 ; 0.111,53.125 0.235,53.277 ; 0.235,0.238 ccw(c0.293,0.285) 0.245,0.227 ; 0.235,0.238 ccw(c0.293,0.285) 0.245,0.227 ; 0.235,53.277 cw(c0.293,53.229) 0.245,53.287 ; 0.235,53.277 cw(c0.293,53.229) 0.245,53.287 ; 0.245,0.227 0.397,0.103 ; 0.245,53.287 0.397,53.412 ; 0.397,0.103 ccw(c0.444,0.161) 0.409,0.095 ; 0.397,0.103 ccw(c0.444,0.161) 0.409,0.095 ; 0.397,53.412 cw(c0.444,53.354) 0.409,53.42 ; 0.397,53.412 cw(c0.444,53.354) 0.409,53.42 ; 0.409,0.095 cw(c0.444,0.161) 0.409,0.095 ; 0.409,0.095 0.582,0.002 ; 0.409,0.095 0.409,0.095 ; 0.409,0.095 0.409,0.095 ; 0.409,53.42 ccw(c0.444,53.354) 0.409,53.42 ; 0.409,53.42 0.582,53.512 ; 0.409,53.42 0.409,53.42 ; 0.409,53.42 0.409,53.42 ; 0.582,0.002 ccw(c0.617,0.068) 0.596,-0.003 ; 0.582,0.002 ccw(c0.617,0.068) 0.582,0.002 ; 0.582,0.002 ccw(c0.617,0.068) 0.595,-0.003 ; 0.582,0.002 0.582,0.002 ; 0.582,0.002 0.582,0.002 ; 0.582,53.512 cw(c0.617,53.446) 0.595,53.518 ; 0.582,53.512 ccw(c0.617,53.446) 0.582,53.512 ; 0.582,53.512 cw(c0.617,53.446) 0.596,53.518 ; 0.582,53.512 0.582,53.512 ; 0.582,53.512 0.582,53.512 ; 0.595,-0.003 ccw(c0.617,0.068) 0.596,-0.003 ; 0.596,-0.003 0.783,-0.06 ; 0.596,-0.003 0.596,-0.003 ; 0.595,-0.003 0.596,-0.003 ; 0.596,53.518 ccw(c0.617,53.446) 0.595,53.518 ; 0.596,53.518 0.783,53.575 ; 0.596,53.518 0.596,53.518 ; 0.595,53.518 0.596,53.518 ; 0.783,-0.06 ccw(c0.805,0.012) 0.798,-0.063 ; 0.783,-0.06 ccw(c0.805,0.012) 0.783,-0.06 ; 0.783,-0.06 ccw(c0.805,0.012) 0.798,-0.063 ; 0.783,-0.06 0.783,-0.06 ; 0.783,-0.06 0.783,-0.06 ; 0.783,53.575 cw(c0.805,53.503) 0.798,53.578 ; 0.783,53.575 ccw(c0.805,53.503) 0.783,53.575 ; 0.783,53.575 cw(c0.805,53.503) 0.798,53.578 ; 0.783,53.575 0.783,53.575 ; 0.783,53.575 0.783,53.575 ; 0.798,-0.063 0.993,-0.082 ; 0.798,53.578 0.993,53.597 ; 0.993,-0.082 ccw(c1,-0.008) 1,-0.083 ; 0.993,-0.082 ccw(c1,-0.008) 1,-0.083 ; 0.993,53.597 cw(c1,53.522) 1,53.597 ; 0.993,53.597 cw(c1,53.522) 1,53.597 ; 1,-0.083 67,-0.083 ; 1,53.597 67,53.597 ; 67,-0.083 ccw(c67,-0.008) 67.007,-0.082 ; 67,-0.083 ccw(c67,-0.008) 67.007,-0.082 ; 67,53.597 cw(c67,53.522) 67.007,53.597 ; 67,53.597 cw(c67,53.522) 67.007,53.597 ; 67.007,-0.082 67.202,-0.063 ; 67.007,53.597 67.202,53.578 ; 67.202,-0.063 ccw(c67.195,0.012) 67.217,-0.06 ; 67.202,-0.063 ccw(c67.195,0.012) 67.217,-0.06 ; 67.202,53.578 cw(c67.195,53.503) 67.217,53.575 ; 67.202,53.578 cw(c67.195,53.503) 67.217,53.575 ; 67.217,-0.06 ccw(c67.195,0.012) 67.217,-0.06 ; 67.217,-0.06 67.404,-0.003 ; 67.217,-0.06 67.217,-0.06 ; 67.217,-0.06 67.217,-0.06 ; 67.217,53.575 ccw(c67.195,53.503) 67.217,53.575 ; 67.217,53.575 67.404,53.518 ; 67.217,53.575 67.217,53.575 ; 67.217,53.575 67.217,53.575 ; 67.404,-0.003 ccw(c67.383,0.068) 67.405,-0.003 ; 67.404,-0.003 ccw(c67.383,0.068) 67.418,0.002 ; 67.404,-0.003 67.405,-0.003 ; 67.404,-0.003 67.404,-0.003 ; 67.404,53.518 cw(c67.383,53.446) 67.418,53.512 ; 67.404,53.518 cw(c67.383,53.446) 67.405,53.518 ; 67.404,53.518 67.405,53.518 ; 67.404,53.518 67.404,53.518 ; 67.405,-0.003 ccw(c67.383,0.068) 67.418,0.002 ; 67.405,53.518 cw(c67.383,53.446) 67.418,53.512 ; 67.418,0.002 ccw(c67.383,0.068) 67.418,0.002 ; 67.418,0.002 67.591,0.095 ; 67.418,0.002 67.418,0.002 ; 67.418,0.002 67.418,0.002 ; 67.418,53.512 ccw(c67.383,53.446) 67.418,53.512 ; 67.418,53.512 67.591,53.42 ; 67.418,53.512 67.418,53.512 ; 67.418,53.512 67.418,53.512 ; 67.591,0.095 ccw(c67.556,0.161) 67.591,0.095 ; 67.591,0.095 67.591,0.095 ; 67.591,0.095 ccw(c67.556,0.161) 67.603,0.103 ; 67.591,0.095 ccw(c67.556,0.161) 67.603,0.103 ; 67.591,0.095 67.591,0.095 ; 67.591,53.42 cw(c67.556,53.354) 67.603,53.412 ; 67.591,53.42 ccw(c67.556,53.354) 67.591,53.42 ; 67.591,53.42 cw(c67.556,53.354) 67.603,53.412 ; 67.591,53.42 67.591,53.42 ; 67.591,53.42 67.591,53.42 ; 67.603,0.103 67.755,0.227 ; 67.603,53.412 67.755,53.287 ; 67.755,0.227 ccw(c67.707,0.285) 67.765,0.238 ; 67.755,0.227 ccw(c67.707,0.285) 67.765,0.238 ; 67.755,53.287 cw(c67.707,53.229) 67.765,53.277 ; 67.755,53.287 cw(c67.707,53.229) 67.765,53.277 ; 67.765,0.238 67.889,0.389 ; 67.765,53.277 67.889,53.125 ; 67.889,0.389 ccw(c67.831,0.437) 67.898,0.401 ; 67.889,0.389 ccw(c67.831,0.437) 67.898,0.401 ; 67.889,53.125 cw(c67.831,53.078) 67.898,53.113 ; 67.889,53.125 cw(c67.831,53.078) 67.898,53.113 ; 67.898,0.401 67.99,0.574 ; 67.898,53.113 67.99,52.94 ; 67.99,0.574 ccw(c67.924,0.61) 67.996,0.588 ; 67.99,0.574 ccw(c67.924,0.61) 67.996,0.588 ; 67.99,52.94 cw(c67.924,52.905) 67.996,52.927 ; 67.99,52.94 cw(c67.924,52.905) 67.996,52.927 ; 67.996,0.588 ccw(c67.924,0.61) 67.996,0.588 ; 67.996,0.588 68.052,0.775 ; 67.996,0.588 67.996,0.588 ; 67.996,0.588 67.996,0.588 ; 67.996,52.927 ccw(c67.924,52.905) 67.996,52.927 ; 67.996,52.927 67.996,52.927 ; 67.996,52.927 68.052,52.739 ; 67.996,52.927 67.996,52.927 ; 68.052,0.775 ccw(c67.981,0.797) 68.053,0.776 ; 68.052,0.775 68.053,0.775 ; 68.053,0.775 ccw(c67.981,0.797) 68.055,0.79 ; 68.053,0.776 ccw(c67.981,0.797) 68.055,0.79 ; 68.053,0.775 68.053,0.776 ; 68.053,52.739 cw(c67.981,52.717) 68.055,52.725 ; 68.053,52.739 ccw(c67.981,52.717) 68.052,52.739 ; 68.053,52.739 cw(c67.981,52.717) 68.055,52.725 ; 68.052,52.739 68.053,52.739 ; 68.053,52.739 68.053,52.739 ; 68.055,0.79 68.075,0.985 ; 68.055,52.725 68.075,52.53 ; 68.075,0.985 ccw(c68,0.992) 68.075,0.992 ; 68.075,0.985 ccw(c68,0.992) 68.075,0.992 ; 68.075,0.992 68.075,52.522 ; 68.075,52.522 ccw(c68,52.522) 68.075,52.53 ; 68.075,52.522 ccw(c68,52.522) 68.075,52.53

## Silkscreen, mask and mechanical layers (free items; w line width, h text height)
Top Overlay:
  drawing of 17 lines, arcs and shapes, not listed
  text "SCALE" at 55.435,39.517 h1.5 r90
  text "ver 1.1" at 1.398,35.955 h0.7 r90
  text "TEMP" at 55.435,28.153 h1.5 r90
  text "12V" at 55.435,9.081 h1.5 r90

## Text inside footprints (layer, text, board x,y; h text height)
CN6: Bottom Overlay "5" at 38.462,4.38 h0.7 r90; Bottom Overlay "4" at 35.922,4.38 h0.7 r90; Bottom Overlay "1" at 28.302,4.126 h0.7 r90; Bottom Overlay "2" at 30.842,4.38 h0.7 r90; Bottom Overlay "3" at 33.382,4.38 h0.7 r90; Bottom Overlay "8" at 46.082,4.38 h0.7 r90; Bottom Overlay "7" at 43.542,4.38 h0.7 r90; Bottom Overlay "6" at 41.002,4.38 h0.7 r90
CN8: Bottom Overlay "5" at 61.3,5.032 h0.7 r90; Bottom Overlay "4" at 58.8,5.032 h0.7 r90; Bottom Overlay "1" at 51.3,5.032 h0.7 r90; Bottom Overlay "2" at 53.8,5.032 h0.7 r90; Bottom Overlay "3" at 56.3,5.032 h0.7 r90; Bottom Overlay "6" at 63.8,5.032 h0.7 r90
CN9: Bottom Overlay "5" at 56.242,52.64 h0.7 r90; Bottom Overlay "4" at 53.702,52.64 h0.7 r90; Bottom Overlay "1" at 46.082,52.386 h0.7 r90; Bottom Overlay "2" at 48.622,52.64 h0.7 r90; Bottom Overlay "3" at 51.162,52.64 h0.7 r90; Bottom Overlay "8" at 63.862,52.64 h0.7 r90; Bottom Overlay "7" at 61.322,52.64 h0.7 r90; Bottom Overlay "6" at 58.782,52.64 h0.7 r90
D1: Top Overlay "+" at 4.109,2.348 h0.7 r90
D2: Top Overlay "+" at 4.109,7.595 h0.7 r90
D3: Top Overlay "+" at 4.109,12.794 h0.7 r90
P2: Top Overlay "3V3" at 56.622,46.191 h1.52; Top Overlay "SCK" at 56.622,43.524 h1.52; Top Overlay "DAT" at 56.622,40.792 h1.52; Top Overlay "GND" at 56.622,38.113 h1.52
P3: Top Overlay "GND" at 56.622,32.678 h1.52; Top Overlay "DAT" at 56.622,30.036 h1.52; Top Overlay "3V3" at 56.622,27.445 h1.52
P4: Top Overlay "VIN" at 56.927,11.527 h1.52; Top Overlay "GND" at 56.659,8.978 h1.52
U5: Top Overlay "SDA" at 43.168,23.043 h1.2; Top Overlay "SCK" at 43.168,25.369 h1.2; Top Overlay "VDD" at 43.168,27.947 h1.2; Top Overlay "GND" at 43.168,30.45 h1.2